# Altium PCB TEST_HJ-185-REV-A.PcbDoc
Units mm, origin at the board's own origin, x right, y up, seen from the top; angles counter-clockwise.
Board outline 35 x 30 mm, 2 copper layers (Component Side, Bottom Layer), stack 0.325 mm thick; 45 components, 40 nets, 163 pads, 36 vias.
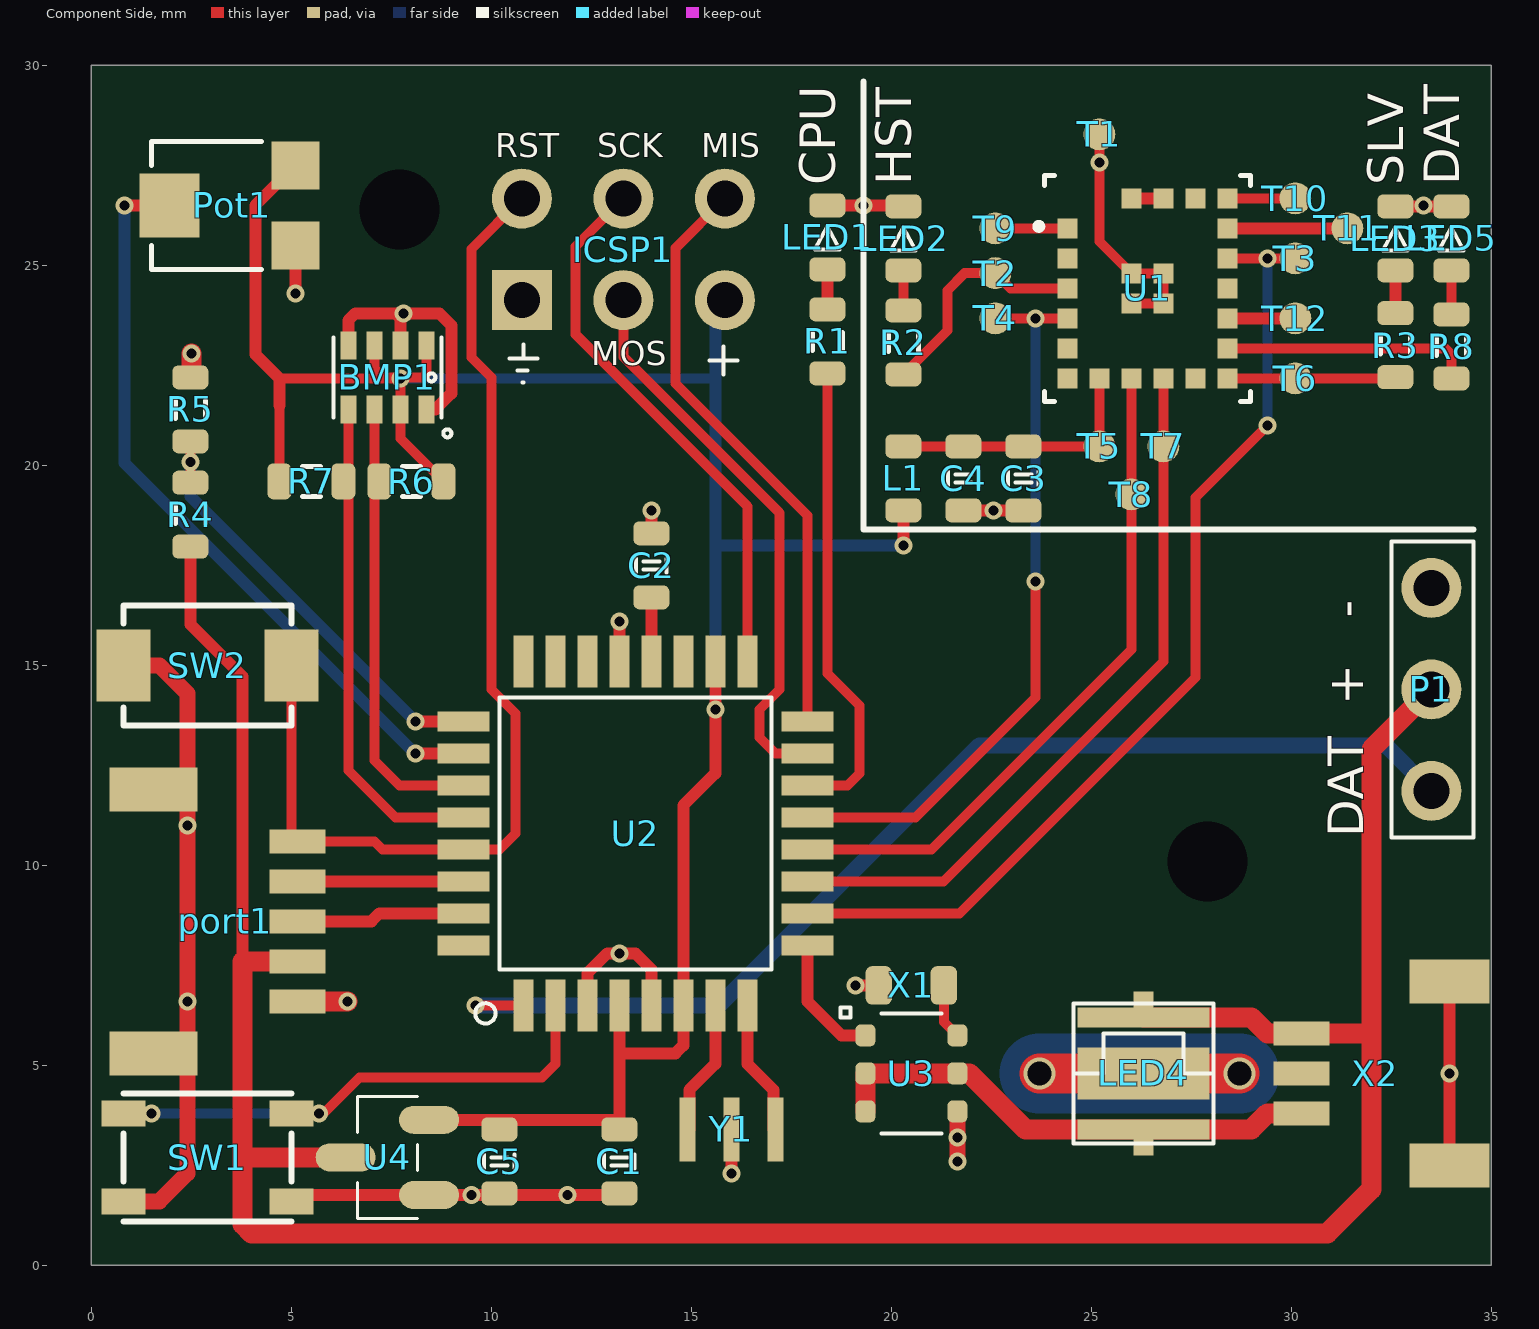
[diagram p0: Component Side view]
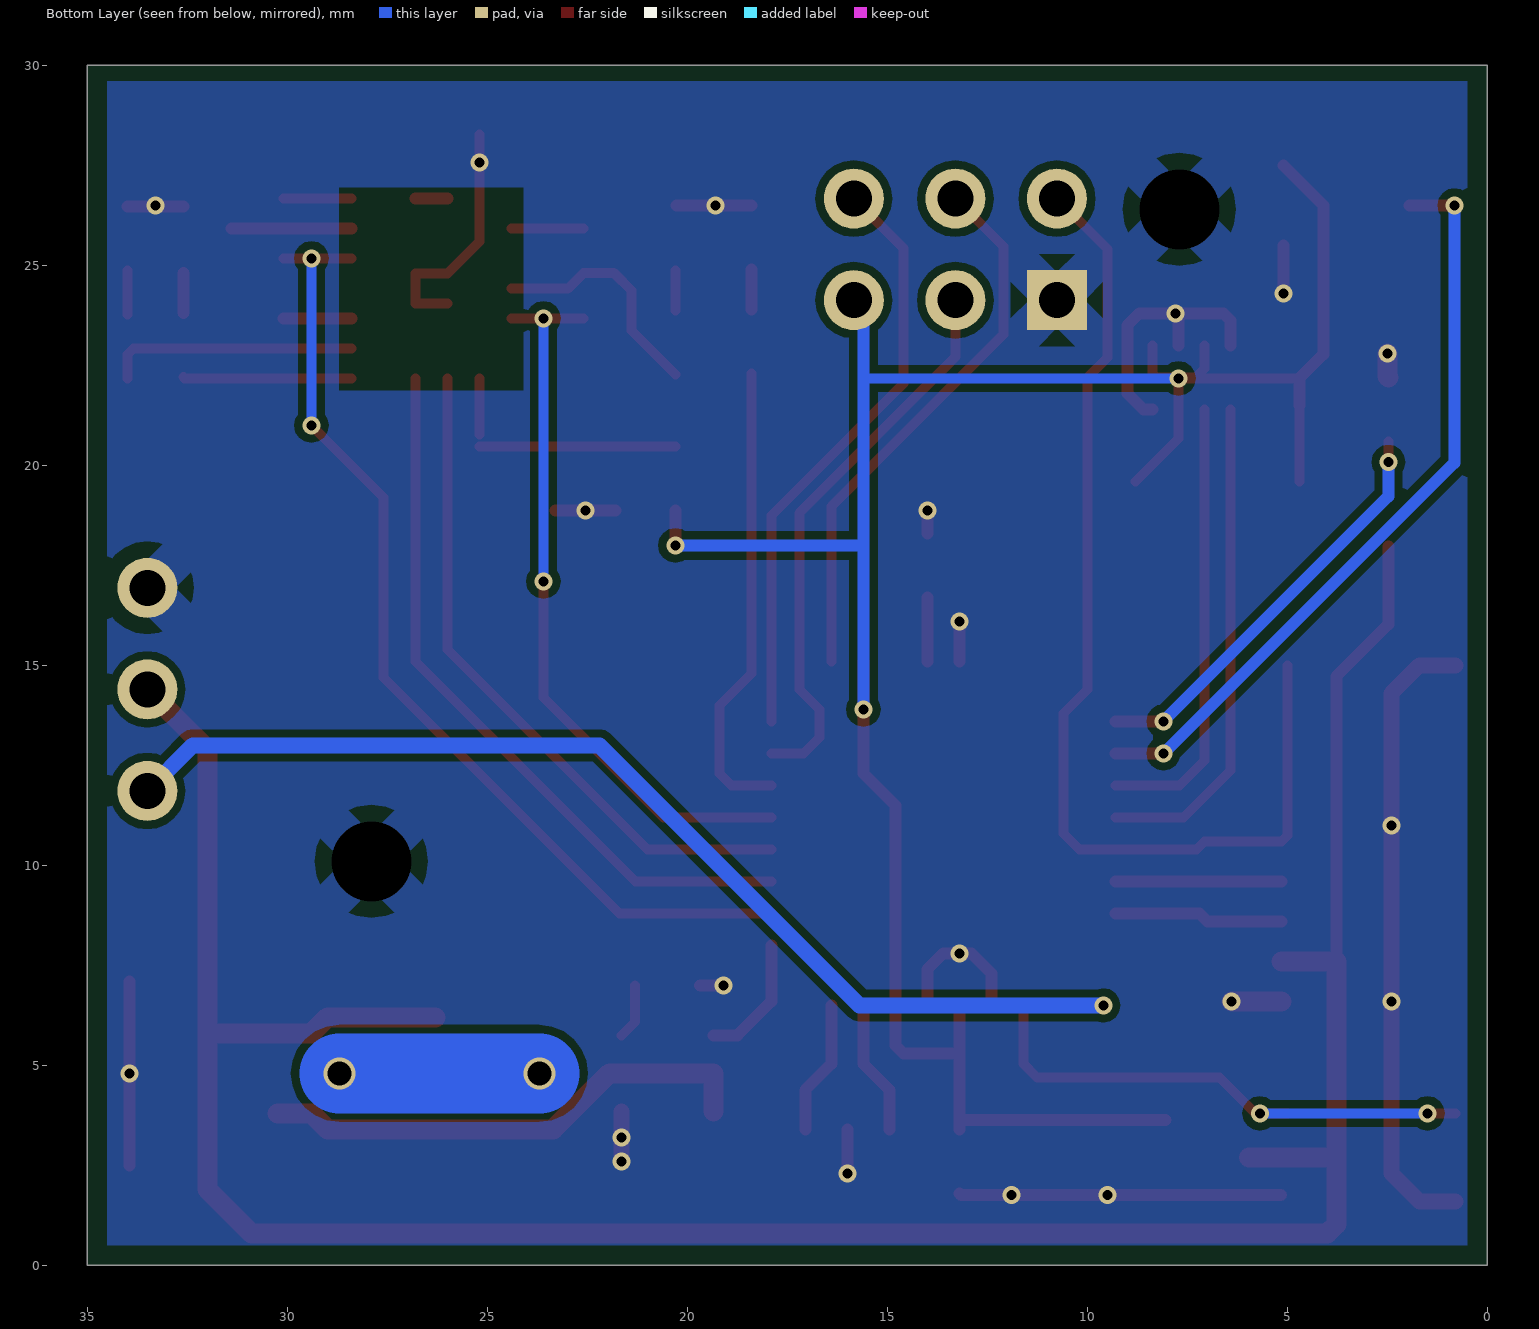
[diagram p1: Bottom Layer view, seen from below]
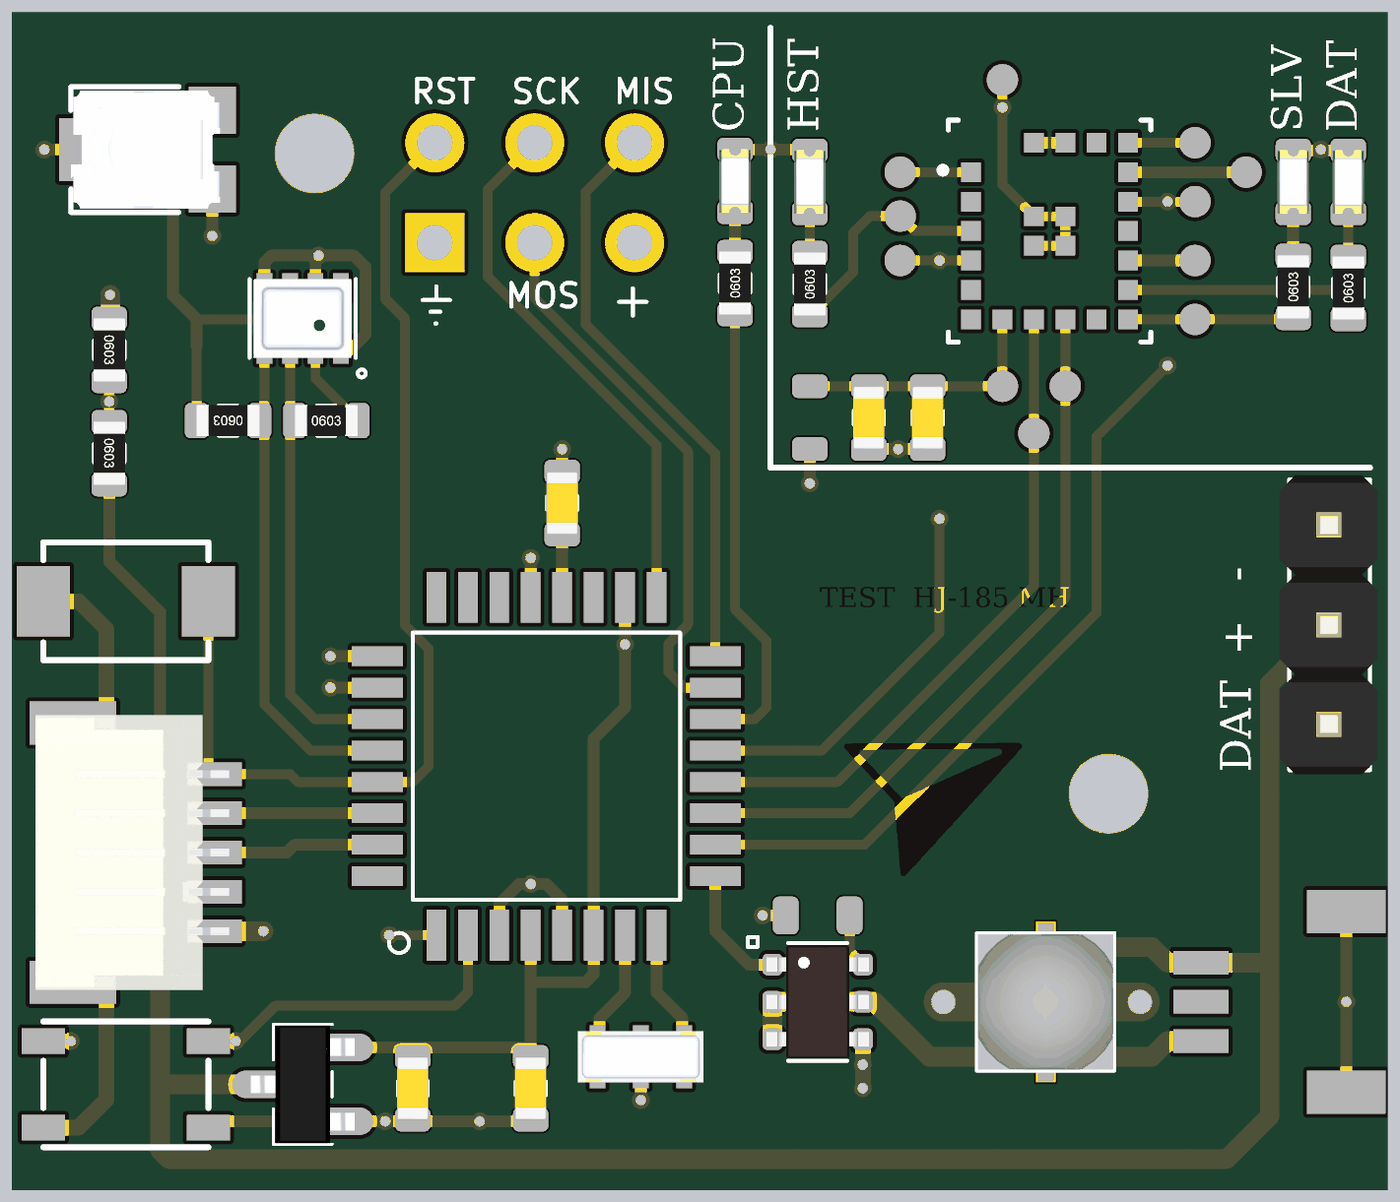
[diagram p2: 3D render of the assembled board from above, using the file's embedded part models]

## Layer stack, top to bottom
Top Solder: solder mask 0.0102, Solder Resist, Dk 3.5
Component Side: signal copper 0.0356
Dielectric 1: core 0.254, FR-4, Dk 4.2
Bottom Layer: signal copper 0.0356
Solder Side: solder mask 0.0102, Solder Resist, Dk 3.5

## Board outline
0,0 35,0 35,30 0,30

## Design rules (kind name [scope] priority, off if disabled: settings)
Clearance Clearance_GND_GND [InNet('GND') vs InNet('GND')] p1: gap=0
Clearance [All] p2: gap=0.2
ComponentClearance [All] p1: gap=0.1 collisioncheckmode=3 verticalgap=0.254 showdistances=FALSE
HoleSize [All] p1: absolutevalues=TRUE maxlimit=10 minlimit=0.025 maxpercent=80.000 minpercent=20.000
MinimumSolderMaskSliver [All] p1 off: minsoldermaskwidth=0.1
PlaneClearance [All] p1: clearance=0
PolygonConnect [All] p1: connectstyle=Relief reliefconductorwidth=0.254 reliefentries=4 polygonreliefangle="45 Angle" airgapwidth=0.254
RoutingVias [All] p1: holewidth=0.6 width=0.9 viastyle="Through Hole" minholewidth=0.3 minwidth=0.5 maxholewidth=0.9 maxwidth=1.2
SilkToSilkClearance [All] p1 off: silktosilkclearance=0.1
SilkToSolderMaskClearance SilkscreenOverComponentPads [IsPad] p1 off: minsilkscreentomaskgap=0.1 clearancetoexposedcopper=TRUE
SolderMaskExpansion [All] p1: expansion=0.102
Width [All] p1: maxlimit=10 minlimit=0.15 preferedwidth=0.3
24 further rules are at their usual default settings.

## Components (designator, comment, footprint, x,y, rotation, side; value= is the part's Value field where it differs from the comment)
BMP1 "± 0.12 hPa equivalent to ±1 m" BMP280 7.4,22.2 r270 top
C1 "0.1uF" C0603-FFT 13.2,2.6 r90 top
C2 "0.1uF" C0603-FFT 14,17.5 r90 top
C3 "1uF" C0603-FFT 23.3,19.675 r90 top
C4 "0.1uF" C0603-FFT 21.8,19.675 r90 top
C5 "1uF" C0603-FFT 10.2,2.6 r90 top
ICSP1 "Progr ICSP" "ICSP prg PIN 2.54mm" 13.3,25.4 r270 top
L1 "10uH" L0603 20.3,19.675 r90 top
LED1 "Yellow" LED0603 18.4,25.7 r270 top
LED2 "Yellow" LED0603 20.3,25.675 r270 top
LED3 "Yellow" LED0603 32.6,25.675 r270 top
LED4 "Cool White" "CREE XPL" 26.3,4.8 r90 top
LED5 "Yellow" LED0603 34,25.675 r270 top
P1 "3ipn" HDR1X3 33.5,14.4 r90 top
port1 "1.0mm 5pin" "JST 5PIN 1MM" 3.3,8.6 r270 top locked
Pot1 "TC33X-10K" "TRIMPOT - TC33X-2-101G" 3.4,26.5 r180 top
R1 "430R" R0603-FFT 18.4,23.1 r90 top
R2 "430R" R0603-FFT 20.3,23.075 r90 top
R3 "430R" R0603-FFT 32.6,23.005 r90 top
R4 "300K" R0603-FFT 2.476,18.769 r270 top
R5 "10k" R0603-FFT 2.476,21.4 r270 top
R6 "4k7" R0603-FFT 8,19.6 r0 top
R7 "4k7" R0603-FFT 5.5,19.6 r180 top
R8 "430R" R0603-FFT 34,22.975 r90 top
SW1 "" "SWITCH TACTILE SKRPACE010" 2.9,2.7 r0 top
SW2 "" "SWITCH TACTILE TS-1088C" 2.9,15 r180 top
T1 "?" "TEST POINT" 25.2,28.275 r0 top
T2 "?" "TEST POINT" 22.6,24.805 r0 top
T3 "?" "TEST POINT" 30.1,25.175 r0 top
T4 "?" "TEST POINT" 22.6,23.675 r0 top
T5 "?" "TEST POINT" 25.2,20.475 r0 top
T6 "?" "TEST POINT" 30.1,22.175 r0 top
T7 "?" "TEST POINT" 26.8,20.475 r0 top
T8 "?" "TEST POINT" 26,19.275 r0 top
T9 "?" "TEST POINT" 22.6,25.925 r0 top
T10 "?" "TEST POINT" 30.1,26.675 r90 top
T11 "?" "TEST POINT" 31.4,25.925 r90 top
T12 "?" "TEST POINT" 30.1,23.675 r90 top
U1 "Value" LGA-24-FFT 26.4,24.425 r0 top
U2 "Value" "32-PIN QFP 10MM" 13.6,10.8 r90 top
U3 "10-200mA" SC74 20.5,4.8 r0 top
U4 "3.3v" SOT23-3 7.4,2.7 r90 top
X1 "Jumper" "0603 CLEAR PAD" 20.5,7 r180 top
X2 "1.0mm 3pin" "JST 3PIN 1MM" 32.1,4.8 r90 top
Y1 "CSTCE8M0V53-R0" OSC_CSTCE16M0V53-R0 16,3.4 r0 top

## Footprints (in the part's own frame and the unit in brackets; to place one, negate y for a bottom-side part, rotate by r counter-clockwise, add the part's x,y. Pads: shape width x height; smd on the part's side, far side on the other; paste and mask are expansions set on the pad)
"32-PIN QFP 10MM" [mm]
  rect 1.3x0.5 smd: 1(-4.3,2.8) 2(-4.3,2) 3(-4.3,1.2) 4(-4.3,0.4) 5(-4.3,-0.4) 6(-4.3,-1.2) 7(-4.3,-2) 8(-4.3,-2.8) 17(4.3,-2.8) 18(4.3,-2) 19(4.3,-1.2) 20(4.3,-0.4) 21(4.3,0.4) 22(4.3,1.2) 23(4.3,2) 24(4.3,2.8)
  rect 0.5x1.3 smd: 9(-2.8,-4.3) 10(-2,-4.3) 11(-1.2,-4.3) 12(-0.4,-4.3) 13(0.4,-4.3) 14(1.2,-4.3) 15(2,-4.3) 16(2.8,-4.3) 25(2.8,4.3) 26(2,4.3) 27(1.2,4.3) 28(0.4,4.3) 29(-0.4,4.3) 30(-1.2,4.3) 31(-2,4.3) 32(-2.8,4.3)
  silkscreen extent -4.75,-3.4 3.4,4, body extent -3.37,-3.37 3.37,3.37, height 1
"0603 CLEAR PAD" [mil] "clear PAD"
  rrect50% 26x38 smd mask+1.97: 1(32,0) 2(-32,0)
BMP280 [mm] "Pressure sensor"
  rect 0.7x0.4 smd: 1(0.8,0.975) 2(0.8,0.325) 3(0.8,-0.325) 4(0.8,-0.975) 5(-0.8,-0.975) 6(-0.8,-0.325) 7(-0.8,0.325) 8(-0.8,0.975)
  silkscreen extent -1,-1.35 1.5,1.6, body extent -1,-1.25 1,1.25, height 1
C0603-FFT [mm] "Capacitor 0603 body"
  rrect50% 0.6x0.9 smd mask+0.05: 1(-0.8,0) 2(0.8,0)
  silkscreen extent -0.18,-0.38 0.18,0.38, body extent -0.8,-0.4 0.8,0.4, height 0.86
"CREE XPL" [mm] "XPL LED"
  rect 0.5x3.3 smd paste-0.05 mask+0.05: A(1.4,0) K(-1.4,0)
  rect 0.5x0.5 smd paste-0.05 mask+0.05: A(1.8,0) K(-1.8,0)
  rect 1.3x3.3 smd paste-0.05 mask+0.05: PAD(0,0)
  silkscreen extent -1.75,-1.75 1.75,1.75, body extent -1.72,-1.72 1.73,1.73, height 2.65
HDR1X3 [mm] "Connector; Pin Header; 3 Position"
  round 1.5 hole 0.9: 1(-2.54,0) 2(0,0) 3(2.54,0)
  silkscreen extent -3.7,-1.05 3.7,1, body extent -3.81,-1.25 3.81,1.25, height 10.64
"ICSP prg PIN 2.54mm" [mm] "pads only"
  round 1.5 hole 0.9: 1(-1.27,2.54) 2(1.27,2.54) 3(-1.27,0) 4(1.27,0) 5(-1.27,-2.54)
  rect 1.5x1.5 hole 0.9: 6(1.27,-2.54)
  silkscreen extent 2.38,-2.85 3.33,2.85
"JST 3PIN 1MM" [mm] "SMD"
  rect 0.6x1.4 smd: 1(-1,1.85) 2(0,1.85) 3(1,1.85)
  rect 1.1x2 smd: 6(-2.3,-1.85) 6(2.3,-1.85)
  body extent -2.5,-2.7 2.5,2.25, height 2.95
"JST 5PIN 1MM" [mm] "SMD"
  rect 0.6x1.4 smd: 1(-2,1.85) 2(-1,1.85) 3(0,1.85) 4(1,1.85) 5(2,1.85)
  rect 1.1x2.2 smd: 6(-3.3,-1.75) 6(3.3,-1.75)
  body extent -3.5,-2.7 3.5,2.25, height 2.9
L0603 [mm] "SMD"
  rrect50% 0.6x0.9 smd mask+0.05: 1(-0.8,0) 2(0.8,0)
  body extent -1.06,-0.37 1.06,0.38, height 0.5
LED0603 [mm] "LED 0603"
  rrect50% 0.6x0.9 smd mask+0.05: A(0.8,0) C(-0.8,0)
  silkscreen extent -0.27,-0.31 0.3,0.31, body extent -0.81,-0.4 0.81,0.4, height 0.6
LGA-24-FFT [mm] "HJ-185 FOOTPRINT"
  rect 0.5x0.5 smd: 1(-2,1.5) 2(-2,0.75) 3(-2,0) 4(-2,-0.75) 5(-2,-1.5) 6(-2,-2.25) 7(-1.2,-2.25) 8(-0.4,-2.25) 9(0.4,-2.25) 10(1.2,-2.25) 11(2,-2.25) 12(2,-1.5) 13(2,-0.75) 14(2,0) 15(2,0.75) 16(2,1.5) 17(2,2.25) 18(1.2,2.25) 19(0.4,2.25) 20(-0.4,2.25) 21(-0.4,-0.375) 21(-0.4,0.375) 21(0.4,-0.375) 21(0.4,0.375)
  silkscreen extent -2.79,-2.83 2.58,2.83, body extent -2.5,-2.75 2.5,2.75, height 1.31
OSC_CSTCE16M0V53-R0 [mm]
  rect 0.4x1.6 smd: 1(-1.1,0) 2(0,0) 3(1.1,0)
  body extent -1.6,-0.65 1.6,0.65, height 1
R0603-FFT [mm] "Resistor 0603 SMD pad"
  rrect50% 0.6x0.9 smd mask+0.05: 1(-0.8,0) 2(0.8,0)
  silkscreen extent -0.23,-0.38 0.23,0.38, body extent -0.8,-0.4 0.8,0.4, height 0.45
SC74 [mm]
  rrect50% 0.5x0.55 smd: 1(-1.15,0.95) 2(-1.15,0) 3(-1.15,-0.95) 4(1.15,-0.95) 5(1.15,0) 6(1.15,0.95)
  silkscreen extent -1.77,-1.5 0.75,1.65, body extent -1.3,-1.45 1.3,1.45, height 1.14
SOT23-3 [mm] "SOT23 3pin"
  oval 0.7x1.5 smd: 1(-0.94,-1.043) 2(0.94,-1.043) 3(0,1.043)
  silkscreen extent -1.52,-0.75 1.52,0.75, body extent -1.5,-1.32 1.5,1.32, height 1.08
"SWITCH TACTILE SKRPACE010" [mm] "white tactile switch 3.2x4.x2mm"
  rect 1.1x0.65 smd: 1(-2.1,1.1) 1(2.1,1.1) 2(-2.1,-1.1) 2(2.1,-1.1)
  silkscreen extent -2.1,-1.6 2.1,1.6, body extent -2.1,-1.6 2.1,1.6, height 2.5
"SWITCH TACTILE TS-1088C" [mm] "Tactile switch 3x4x2.5mm"
  rect 1.35x1.8 smd: 1(-2.1,0) 2(2.1,0)
  silkscreen extent -2.1,-1.5 2.1,1.5, body extent -2.6,-1.45 2.6,1.45, height 2
"TEST POINT" [mm] "Testpoint"
  round 0.8 smd: 1(0,0)
"TRIMPOT - TC33X-2-101G" [mm] "Trim pot smd SMD 3x3mm"
  rect 1.2x1.2 smd: 1(-1.7,1) 3(-1.7,-1)
  rect 1.5x1.6 smd: 2(1.45,0)
  silkscreen extent -0.85,-1.6 1.9,1.6, body extent -1.9,-1.5 1.9,1.5, height 1.1

## Part data
BMP1: library part "BMP 280", "Pressure sensor"
C1 C2 C4: library part C0603_0.1uF_50V, "C0603_0.1uF_50V"
C3 C5: library part C0603_1uF_25V, "C0603_1uF_25V"
ICSP1: "PAD prog"
L1: library part L0603_10uH, "Inductor"
LED1 LED2 LED3 LED5: library part 19-213/Y2C-CQ2R2L/3T(CY), "LED 0603 chip"
LED4: library part XPL, "LED"
P1: library part "Header 3x1", "Header 3x1-PIN, 2.54mm"
port1: library part SM05B-SRSS-TB, "Connector 5p hor 1mm"
Pot1: "TrimPot SMD"
R1 R2 R3 R8: library part R0603_430, "SMD resistor"
R4: library part R0603_300k, "SMD resistor"
R5: library part R0603_10k, "SMD resistor"
R6 R7: library part R0603_4k7, "SMD resistor"
SW1: library part SKRPACE010, "Switch Tactile"
SW2: library part TS-1088C-02526, "Switch Tactile"
T1 T2 T3 T4 T5 T6 T7 T8 T9 T10 T11 T12: library part "Test Point", "Test Point"
U1: library part HJ-185MH, "Module BLE"
U2: library part "Atmega 328P-AU", "MCU"
U3: library part BRC420U, "LED Driver 10-200mA"
U4: library part AP2210N-3.3TRG1, "LDO 3.3V 300mA"
X1: library part "Jumper 0603", "Pad"
X2: library part SM03B-SRSS-TB, "Connector 3p hor 1mm"
Y1: "Ceramic Resonator 8Mhz"

## Free pads (board coordinates)
  round 1.5 hole 2: 3(27.9,10.1) 4(7.7,26.4)

## Via types
v1: diameter 0.45, hole 0.25, Component Side to Bottom Layer, tented both sides, 34 vias
v2: diameter 0.8, hole 0.6, Component Side to Bottom Layer, tented both sides, 2 vias

## Nets (pads, with @x,y where several pads share a name; then routed paths per layer and width w, separated by ;. In a path a pad name is that pad's centre, name@x,y a point inside that pad or via, vN(x,y) a via of type N, cw(c..) or ccw(c..) an arc to the next point about the centre after c; other vN are vias at no path point)
3.3V: BMP1.2 BMP1.6 BMP1.8 C1.2 C5.2 ICSP1.2 L1.1 Pot1.3 R6.2 R7.2 U2.4 U2.6 U2.18 U4.2 | length 61
  Component Side w0.25: R7.2 4.7,21.5 ; 4.7,22.175 v1(7.725,22.175) 7.725,20.675 R6.2 ; BMP1.6 7.075,22.425 7.3,22.2 8.275,22.2 8.375,22.3 BMP1.8
  Component Side w0.3: 4.7,21.5 4.7,22.175 4.1,22.775 4.1,26.5 Pot1.3 ; U4.2@8.043,3.64 U4.2 11.9,3.64 C1.2@13.2,3.64 ; C1.2 C1.2@13.2,3.64 ; U2.4 13.2,5.3 ; U2.18 v1(15.6,13.9) 15.6,12.3 14.8,11.5 U2.6 14.8,5.5 14.6,5.3 13.2,5.3 ; v1(20.3,18) L1.1 ; C1.2@13.2,3.64 13.2,5.3
  Bottom Layer w0.25: v1(7.725,22.175) 15.575,22.175 15.6,22.2
  Bottom Layer w0.3: v1(15.6,13.9) 15.6,17.9 ; ICSP1.2 15.6,23.89 15.6,22.2 15.6,17.9 ; v1(20.3,18) 15.7,18 15.6,17.9
BLE_CONFIG: T3.1 U1.15 U2.10 | length 25.1
  Component Side w0.25: U2.10 21.7,8.8 27.6,14.7 27.6,19.2 v1(29.4,21) ; U1.15 v1(29.4,25.175) T3.1
  Bottom Layer w0.25: v1(29.4,21) v1(29.4,25.175)
BLE_RX: T8.1 U1.8 U2.12 | length 16.9
  Component Side w0.25: U2.12 21,10.4 26,15.4 U1.8
BLE_TX: T4.1 U1.4 U2.13 | length 18.2
  Component Side w0.25: U2.13 20.6,11.2 23.6,14.2 v1(23.6,17.1) ; T4.1 v1(23.6,23.675) U1.4
  Bottom Layer w0.25: v1(23.6,17.1) v1(23.6,23.675)
BLE_WAKEUP: T7.1 U1.9 U2.11 | length 18.3
  Component Side w0.25: U2.11 21.3,9.6 26.8,15.1 T7.1 U1.9
BUT: SW1.1 U2.2 | length 13.5
  Component Side w0.25: SW1.1@0.8,3.8 v1(1.5,3.8) ; SW1.1@5,3.8 v1(5.69,3.8) 5.8,3.8 6.7,4.7 11.26,4.7 11.6,5.04 U2.2
  Bottom Layer w0.25: v1(1.5,3.8) v1(5.69,3.8)
GND: BMP1.1 BMP1.5 BMP1.7 C1.1 C2.2 C3.1 C4.1 C5.1 ICSP1.6 LED1.C LED2.C LED3.C LED5.C P1.3 pad.3 pad.4 port1.5 port1.6 Pot1.1 R5.1 SW1.2 SW2.2 T1.1 U1.21 U2.3 U2.5 U2.21 U3.4 U4.1 X1.1 X2.6 Y1.2 | length 57.4
  Component Side w0.25: T1.1 25.2,25.6 26,24.8 26.8,24.8 26.8,24.05 U1.21@26,24.05
  Component Side w0.3: v1(5.1,24.3) Pot1.1 ; SW1.2@5.16,1.76 13.16,1.76 C1.1 ; BMP1.5 6.425,23.625 6.6,23.8 v1@7.6,23.8 ; BMP1.7 7.725,23.675 v1@7.6,23.8 ; BMP1.1 8.6,21.4 9,21.8 9,23.5 8.7,23.8 v1@7.6,23.8 ; U2.3 12.4,7.3 12.9,7.8 13.6,7.8 14,7.4 U2.5 ; U2.21 v1(13.2,16.1) ; C2.2 v1(14,18.875) ; v1(16,2.3) Y1.2 ; LED1.C v1(19.3,26.5) LED2.C@20.275,26.5 ; v1(19.1,7) X1.1 ; C4.1 C3.1 ; LED3.C LED5.C ; X2.6@33.95,2.5 v1(33.95,4.8) X2.6@33.95,7.1
  Component Side w0.4: SW1.2@0.8,1.6 1.7,1.6 2.4,2.3 2.4,14.3 1.7,15 SW2.2 ; v1(21.65,2.6) U3.4
  Component Side w0.5: R5.1 2.5,22.224 v1(2.5,22.8) ; port1.5 v1(6.4,6.6)
  other v1: 9.5,1.76 11.9,1.76 21.65,3.2 2.4,6.6 13.2,7.8 2.4,11 22.55,18.875 7.8,23.8 33.3,26.5 25.2,27.575
HEAT: LED4.PAD | length 10
  Component Side w1: v2(23.7,4.8) LED4.PAD v2(28.7,4.8)
  Bottom Layer w2: v2(23.7,4.8) v2(28.7,4.8)
LED_RETURN: LED4.K U3.2 U3.3 U3.5 X2.1 | length 12.6
  Component Side w0.5: U3.3 U3.2 U3.5 21.95,4.8 23.35,3.4 26.3,3.4 29,3.4 29.4,3.8 X2.1
LED_STATUS: R1.1 U2.14 | length 11.8
  Component Side w0.25: U2.14 18.9,12 19.2,12.3 19.2,14 18.4,14.8 R1.1
NetC2_1: C2.1 U2.20 | length 1.6
  Component Side w0.3: U2.20 C2.1
NetC3_2: C3.2 C4.2 L1.2 T5.1 U1.7 | length 6.3
  Component Side w0.25: L1.2 C4.2 C3.2 T5.1 ; T5.1@25.2,20.775 U1.7
NetICSP1_1: ICSP1.1 U2.16 | length 15
  Component Side w0.25: ICSP1.1 14.6,25.43 14.6,22.05 17.9,18.75 U2.16
NetICSP1_3: ICSP1.3 U2.17 | length 13.8
  Component Side w0.25: ICSP1.3 12.1,25.47 12.1,23.277 16.4,18.977 U2.17
NetICSP1_4: ICSP1.4 U2.15 | length 14.1
  Component Side w0.25: ICSP1.4 13.3,22.714 17.2,18.814 17.2,14.4 16.7,13.9 16.7,13.2 17.1,12.8 U2.15
NetLED1_A: LED1.A R1.2 | length 1
  Component Side w0.3: R1.2 LED1.A
NetLED2_A: LED2.A R2.2 | length 1
  Component Side w0.25: R2.2 LED2.A
NetLED3_A: LED3.A R3.2 | length 1
  Component Side w0.3: R3.2 LED3.A@32.6,24.805
NetLED5_A: LED5.A R8.2 | length 1.1
  Component Side w0.25: R8.2 LED5.A
NetPot1_2: Pot1.2 U2.26 | length 19
  Component Side w0.3: v1(0.825,26.5) Pot1.2 ; v1(8.1,12.8) U2.26
  Bottom Layer w0.3: v1(0.825,26.5) 0.825,20.062 8.087,12.8 v1(8.1,12.8)
NetR2_1: R2.1 T2.1 U1.3 | length 5.9
  Component Side w0.25: R2.1 21.4,23.375 21.4,24.375 21.83,24.805 T2.1 22.98,24.425 U1.3
NetR3_1: R3.1 T6.1 U1.11 | length 4.2
  Component Side w0.25: U1.11 32.57,22.175 R3.1
NetR8_1: R8.1 U1.12 | length 6.3
  Component Side w0.25: U1.12 33.85,22.925 34,22.775 R8.1
NetT9_1: T9.1 U1.1 | length 1.8
  Component Side w0.25: T9.1 U1.1
NetT10_1: T10.1 U1.17 | length 1.7
  Component Side w0.25: U1.17 T10.1
NetT11_1: T11.1 U1.16 | length 3
  Component Side w0.3: U1.16 T11.1
NetT12_1: T12.1 U1.13 | length 1.7
  Component Side w0.3: U1.13 T12.1
NetU1_19: U1.19 U1.20 | length 0.8
  Component Side w0.3: U1.20 U1.19
NetU2_7: U2.7 Y1.1 | length 3.4
  Component Side w0.3: Y1.1@14.95,3.4 14.95,4.39 15.6,5.04 15.6,5.54 U2.7
NetU2_8: U2.8 Y1.3 | length 3.4
  Component Side w0.3: U2.8 16.4,5.54 16.4,5.04 17.05,4.39 Y1.3@17.05,3.4
NetU3_6: U3.6 X1.2 | length 1.4
  Component Side w0.25: X1.2 21.313,6.087 U3.6
RESET: ICSP1.5 port1.1 SW2.1 U2.29 | length 27
  Component Side w0.25: SW2.1 5,10.75 port1.1 7.075,10.6 7.275,10.4 U2.29 10.2,10.4 10.6,10.8 10.6,13.8 10,14.4 10,22.2 9.5,22.7 9.5,25.41 ICSP1.5
RX: port1.2 U2.30 | length 4.1
  Component Side w0.3: port1.2 U2.30
SCL: BMP1.4 R7.1 U2.28 | length 12.4
  Component Side w0.25: BMP1.4 6.425,12.375 7.6,11.2 U2.28
SDA: BMP1.3 R6.1 U2.27 | length 11.3
  Component Side w0.25: BMP1.3 7.075,12.625 7.7,12 U2.27
SERVO: P1.1 U2.1 | length 28.3
  Component Side w0.25: v1(9.6,6.5) U2.1
  Bottom Layer w0.4: v1(9.6,6.5) 15.7,6.5 22.2,13 32.36,13 P1.1
STROBE: U2.9 U3.1 | length 3.2
  Component Side w0.3: U2.9 17.9,6.6 18.75,5.75 U3.1
TX: port1.3 U2.31 | length 4.2
  Component Side w0.3: port1.3 7,8.6 7.2,8.8 U2.31
VIN: LED4.A P1.2 port1.4 R4.2 U4.3 X2.3 | length 68.8
  Component Side w0.3: R4.2 2.476,16.024 3.776,14.724 3.776,7.6
  Component Side w0.5: port1.4 3.776,7.6 3.776,2.7 ; U4.3@5.957,2.7 3.776,2.7 ; LED4.A@26.3,6.2 29,6.2 29.4,5.8 32,5.8 ; P1.2 32,12.9 32,5.8 ; 3.776,2.7 3.776,1.024 4,0.8 30.9,0.8 32,1.9 32,5.8
VOLTMETER: R4.1 R5.2 U2.25 | length 11
  Component Side w0.25: R4.1 v1(2.476,20.084) R5.2
  Component Side w0.3: v1(8.1,13.6) U2.25
  Bottom Layer w0.3: v1(2.476,20.084) 2.476,19.224 v1(8.1,13.6)
pads on no net: U1.2 U1.5 U1.6 U1.10 U1.14 U1.18 U2.19 U2.22 U2.23 U2.24 U2.32 X2.2

## Polygon pours and split planes (outlines as drawn)
GND on Bottom Layer "Bottom Layer-GND" (solid, pour order 8): 0.5,29.6 34.5,29.6 34.5,0.5 0.5,0.5

## Other copper
Bottom Layer:
  pour cut-out: 24.1,26.945 28.7,26.945 28.7,21.875 24.1,21.875

## Silkscreen, mask and mechanical layers (free items; w line width, h text height)
Top Overlay:
  lines w0.15: 19.3,29.6 19.3,18.4 34.55,18.4
  text "CPU" at 18.9,27 h1.52 r90
  text "HST" at 20.8,27 h1.52 r90
  text "SLV" at 33.1,27 h1.52 r90
  text "DAT" at 34.5,27 h1.52 r90
  text "DAT  +   -" at 32.1,10.7 h1.52 r90
Top Solder:
  region: 891 vertices and 1 holes, not listed, extent 21.159,7.995 25.697,11.398
  text "TEST  HJ-185 MH" at 20.6,13.3 h1
Mechanical 2:
  the board outline again, w0.2

## Dimensions
0,0 to 35,0 on Mechanical 16
0,0 to 0,30 on Mechanical 16

## Text inside footprints (layer, text, board x,y; h text height)
ICSP1: Top Overlay "MIS" at 15.25,27.7 h0.6; Top Overlay "MOS" at 12.5,22.5 h0.6; Top Overlay "SCK" at 12.65,27.7 h0.6; Top Overlay "RST" at 10.1,27.7 h0.6